# Altium PCB MB1189.PcbDoc (part 2 of 3)
Units mil, origin at the board's own origin, x right, y up, seen from the top; angles counter-clockwise.
Board outline 3826.77 x 2234.25 mil, 6 copper layers (Top Layer, GND_TOP, Internal Signal 1, VCC, Internal Signal 2, Bottom Layer), stack 62.65 mil thick; 150 components, 157 nets, 740 pads, 457 vias.
Unrouted connection lines stored in the file: 6.
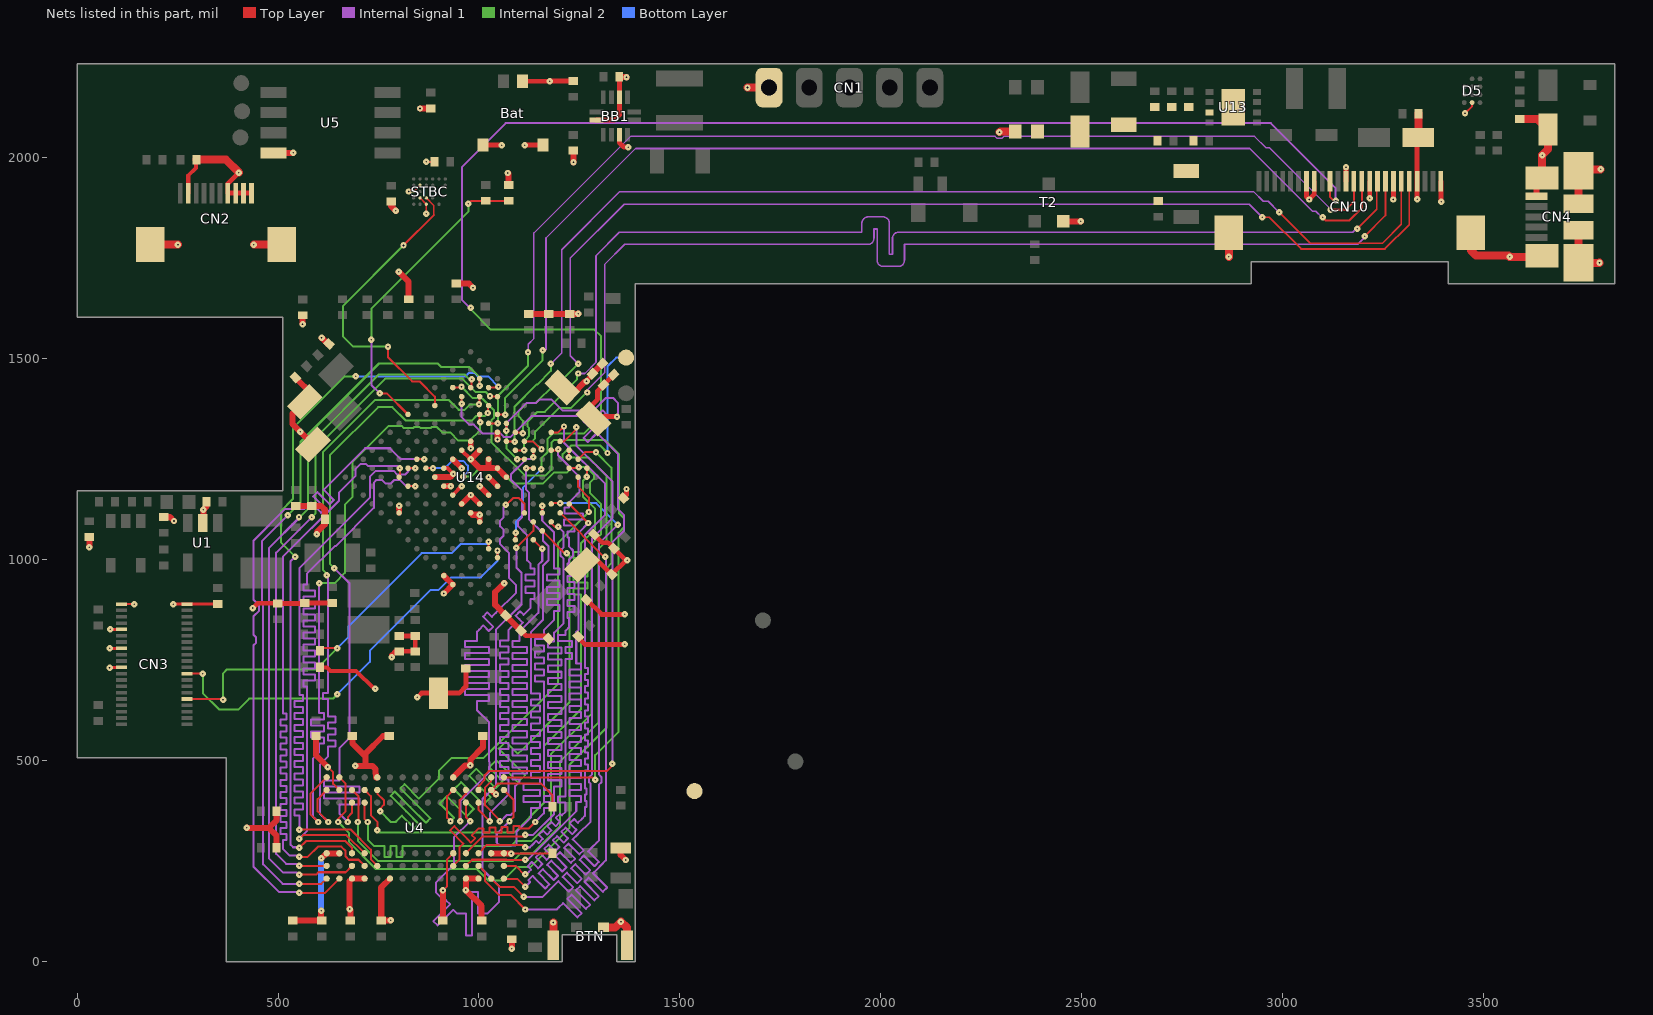
[diagram p6: the nets of this part, all layers, seen from the top]

## Via types
v1: diameter 16, hole 4, Top Layer to Bottom Layer, 457 vias

## Nets (pads, with @x,y where several pads share a name; then routed paths per layer and width w, separated by ;. In a path a pad name is that pad's centre, name@x,y a point inside that pad or via, vN(x,y) a via of type N, cw(c..) or ccw(c..) an arc to the next point about the centre after c; other vN are vias at no path point) (continued)
BATMS: Rdiv1.1 Rdiv2.2 U14.A8 | length 775.8
  Top Layer w5: v1(752.95,1414.37) 770.67,1414.37 U14.A8@823.43,1361.61 ; v1(973.47,1885.92) 980.94,1893.39 Rdiv1.1@1016.74,1893.39 Rdiv2.2@1073.81,1893.39
  Internal Signal 1 w5: v1(732.28,1547.24) 732.28,1435.04 v1(752.95,1414.37)
  Internal Signal 2 w5: v1(732.28,1547.24) 732.28,1625 973.47,1866.19 v1(973.47,1885.92)
BATMS_EN: STBC.C2 U14.B10 | length 774.6
  Top Layer w4: STBC.C2@869.09,1900.59 887.8,1881.89 887.8,1857.71
  Top Layer w5: v1(773.62,1530.51) 773.62,1504.05 833.75,1443.92 852.12,1443.92 890.25,1405.8 U14.B10@890.25,1383.88 ; v1(812.29,1782.2) 887.8,1857.71
  Internal Signal 2 w5: v1(773.62,1530.51) 687.01,1530.51 661.42,1556.1 661.42,1568.82 661.34,1568.9 661.34,1631.26 v1(812.29,1782.2)
BLGND: C55.2 C56.2 C61.2 C63.1 C64.1 C66.1 C79.2 L2.2 R58.1 R59.2 U13.3 U13.9 | length 0.9
  Top Layer w12: C64.1@2765.75,2126.6 C64.1@2766.36,2125.98
BOOT0: TP8.1 U14.E6 | length 898.2
  Top Layer w5: U14.E6@867.97,1227.98 877.72,1227.98 v1(885.72,1227.98)
  Internal Signal 2 w5: v1(960.68,1206.75) 980.37,1206.75 1001.97,1228.35 1046.26,1228.35 1084.65,1189.96 1159.81,1189.96 1186.53,1216.68 1218.65,1216.68 1224.41,1222.44 1224.41,1232.14 1207.98,1248.56 1207.98,1263.1 1229.33,1284.45 1301.31,1284.45 v1(1319.95,1265.81)
  Bottom Layer w5: v1(885.72,1227.98) 914.99,1227.98 933.07,1246.06 960.9,1246.06 972.56,1234.4 972.56,1218.63 v1(960.68,1206.75) ; v1(1319.95,1265.81) 1319.95,1481.36 1341.54,1502.95 TP8.1@1366.14,1502.95
CAM_PWDN: CN3.17 U14.P5 | length 1050.4
  Top Layer w5: CN3.17@273.82,716.54 v1@312.97,716.54 ; U14.P5@1046.14,1005.27 1046.14,1015.01 v1(1046.14,1023.01)
  Internal Signal 2 w5: v1(313.01,716.57) 313.01,668.29 354.33,626.97 400.59,626.97 428.15,654.53 636.81,654.53 v1(647.64,665.35)
  Bottom Layer w5: v1(647.64,665.35) 728.35,746.06 728.35,773.62 879.95,925.23 899.64,925.23 930.75,956.34 1004.57,956.34 1046.14,997.92 v1(1046.14,1023.01)
CAM_RST: CN3.9 R7.1 U14.N5 | length 1031
  Top Layer w5: CN3.9@273.82,653.54 361.22,653.54 v1(363.19,651.57) ; R7.1@604.64,775.26 609.3,779.92 v1(647.64,779.92) ; U14.N5@1023.87,1027.54 1023.87,1037.28 v1(1023.87,1045.28)
  Internal Signal 2 w5: v1(363.19,651.57) 363.19,717.52 373.03,727.36 595.08,727.36 v1(647.64,779.92)
  Bottom Layer w5: v1(647.64,779.92) 675.71,808 675.71,834.93 857.52,1016.73 932.09,1016.73 954.72,1039.37 1017.96,1039.37 v1(1023.87,1045.28)
D0: TP1.1 U4.R8 U14.L12 | length 1729.2
  Top Layer w5: U4.R8@1062.01,427.17 1085.63,403.54 1085.63,359.04 v1(1076,349.41) ; v1(1117.48,1227.98) 1125.48,1227.98 U14.L12@1135.23,1227.98
  Internal Signal 1 w5: v1(1076,349.41) 1044.5,317.91 1044.29,317.91 1044.29,296.26 1051.18,289.37 1091.54,289.37 1093.5,291.34 1093.5,323.1 1129.92,359.52 1129.92,367.02 1129.92,382.02 1151.42,382.02 1151.42,397.02 1129.92,397.02 1110.39,397.02 1110.39,412.02 1129.92,412.02 1151.42,412.02 1151.42,427.02 1129.92,427.02 1110.39,427.02 1110.39,442.02 1129.92,442.02 1151.42,442.02 1151.42,457.02 1129.92,457.02 1129.92,472.02 1151.42,472.02 1151.42,487.02 1129.92,487.02 1129.92,502.02 1151.42,502.02 1151.42,517.02 1129.92,517.02 1129.92,532.02 1151.42,532.02 1151.42,547.02 1129.92,547.02 1129.92,562.02 1151.42,562.02 1151.42,577.02 1129.92,577.02 1129.92,592.02 1151.42,592.02 1151.42,607.02 1129.92,607.02 1129.92,622.02 1151.42,622.02 1151.42,637.02 1129.92,637.02 1129.92,652.02 1151.42,652.02 1151.42,667.02 1129.92,667.02 1129.92,682.02 1129.92,688.98 1129.92,820.87 1159.45,850.39 1159.45,984.87 1173,998.43 1173,1033.96 1159.45,1047.51 1159.45,1065.96 1124.26,1101.15 1124.26,1167.59 1117.48,1174.36 v1(1117.48,1227.98)
D1: U4.N7 U14.K13 | length 1751.6
  Top Layer w5: U4.N7@999.02,395.67 999.02,377.44 v1(1027.04,349.41) ; v1(1134.84,1254.92) 1135.23,1255.31 U14.K13@1135.23,1272.52
  Internal Signal 1 w5: v1(1027.04,349.41) 1027.04,369.56 1073.82,416.34 1073.82,423.84 1073.82,438.84 1073.82,453.84 1052.32,453.84 1052.32,468.84 1073.82,468.84 1073.82,483.84 1052.32,483.84 1052.32,498.84 1073.82,498.84 1073.82,513.84 1052.32,513.84 1052.32,528.84 1073.82,528.84 1073.82,543.84 1052.32,543.84 1052.32,558.84 1073.82,558.84 1073.82,573.84 1052.32,573.84 1052.32,588.84 1073.82,588.84 1073.82,603.84 1052.32,603.84 1052.32,618.84 1073.82,618.84 1073.82,633.84 1052.32,633.84 1052.32,648.84 1073.82,648.84 1073.82,663.84 1052.32,663.84 1052.32,678.84 1073.82,678.84 1073.82,693.84 1052.32,693.84 1052.32,708.84 1073.82,708.84 1073.82,723.84 1052.32,723.84 1052.32,738.84 1073.82,738.84 1073.82,753.84 1052.32,753.84 1052.32,768.84 1073.82,768.84 1073.82,783.84 1052.32,783.84 1052.32,798.84 1073.82,798.84 1073.82,813.84 1073.82,825.79 1079.12,831.09 1089.73,841.7 1098.41,833.02 1109.01,843.63 1100.34,852.3 1091.49,861.15 1102.09,871.76 1110.94,862.91 1121.55,873.52 1128.46,880.43 1128.46,887.93 1128.46,902.93 1137.64,902.93 1137.64,917.93 1128.46,917.93 1116.19,917.93 1116.19,932.93 1128.46,932.93 1137.64,932.93 1137.64,947.93 1128.46,947.93 1116.19,947.93 1116.19,962.93 1128.46,962.93 1137.64,962.93 1137.64,977.93 1128.46,977.93 1128.46,986.22 1128.46,990.12 1119.73,998.85 1119.73,1061.13 1097.46,1083.41 1097.46,1096.25 1107.28,1106.07 1107.28,1171.72 1079.71,1199.29 1079.71,1212.83 1117.48,1250.6 1130.52,1250.6 v1(1134.84,1254.92)
D2: U4.R9 U14.B12 | length 1727.1
  Top Layer w5: U14.B12@934.79,1428.42 954.23,1428.42 v1(956.61,1430.8) ; U4.R9@1062.01,458.66 1283.46,458.66 v1(1289.37,452.76)
  Internal Signal 2 w5: v1(956.61,1430.8) 985.04,1402.38 1006.47,1402.38 1008.26,1400.59 1008.86,1400.59 1037.4,1372.05 1037.4,1353.61 1030.64,1346.86 1030.64,1292.9 1113.44,1210.1 1165.81,1210.1 1181.07,1225.36 1181.07,1292.29 1187.01,1298.23 1312.99,1298.23 1348.43,1262.8 1348.43,1115.65 1360.97,1103.1 1360.97,1081.18 1347.44,1067.65 1347.44,571.85 1289.37,513.78 v1(1289.37,452.76)
D3: U4.N8 U14.C12 | length 1852.9
  Top Layer w5: v1(957.06,1388.4) 957.06,1396.4 U14.C12@957.06,1406.15 ; U4.N8@999.02,427.17 999.02,436.92 1014.39,452.29 1014.39,464.28 1024.14,474.04 1318.52,474.04 1331.76,487.27 v1(1331.76,492.15)
  Internal Signal 1 w5: v1(957.06,1388.4) 957.06,1354.95 974.92,1337.09 985.75,1337.09 986.74,1336.1 987.45,1336.1 1008.73,1314.82 1052.56,1314.82 1061.29,1306.09 1079,1306.09 1130.19,1357.28 1251.37,1357.89 1261.97,1347.28 ; 1260.04,1345.34 1270.64,1334.74 1272.58,1336.67 1307.93,1372.03 1318.54,1361.42 1283.19,1326.07 1260.39,1303.27 1271,1292.66 1293.79,1315.46 1300.2,1309.06 1346.46,1262.8 1346.46,1125.98 1361.22,1111.22 1361.22,1072.83 1331.76,1043.37 v1(1331.76,492.15)
D4: U4.P9 U14.R8 | length 1719
  Top Layer w5: U4.P9@1030.51,458.66 1030.51,448.91 1015.14,433.53 1015.14,388.69 1051.52,352.31 v1(1051.52,349.41) ; U14.R8@1135.23,1049.81 v1(1157.5,1027.54)
  Internal Signal 1 w5: v1(1051.52,349.41) 1054.08,349.41 1069.58,364.91 1079.48,364.91 1090.3,375.74 1090.3,436.76 1100.39,446.85 1100.39,453.37 1083.82,453.37 1083.82,468.37 1100.39,468.37 1119.92,468.37 1119.92,483.37 1100.39,483.37 1083.82,483.37 1083.82,498.37 1100.39,498.37 1119.92,498.37 1119.92,513.37 1100.39,513.37 1083.82,513.37 1083.82,528.37 1100.39,528.37 1119.92,528.37 1119.92,543.37 1100.39,543.37 1083.82,543.37 1083.82,558.37 1100.39,558.37 1119.92,558.37 1119.92,573.37 1100.39,573.37 1083.82,573.37 1083.82,588.37 1100.39,588.37 1119.92,588.37 1119.92,603.37 1100.39,603.37 1083.82,603.37 1083.82,618.37 1100.39,618.37 1119.92,618.37 1119.92,633.37 1100.39,633.37 1083.82,633.37 1083.82,648.37 1100.39,648.37 1119.92,648.37 1119.92,663.37 1100.39,663.37 1083.82,663.37 1083.82,678.37 1100.39,678.37 1119.92,678.37 1119.92,693.37 1100.39,693.37 1083.82,693.37 1083.82,708.37 1100.39,708.37 1119.92,708.37 1119.92,723.37 1100.39,723.37 1083.82,723.37 1083.82,738.37 1100.39,738.37 1119.92,738.37 1119.92,753.37 1100.39,753.37 1083.82,753.37 1083.82,768.37 1100.39,768.37 1119.92,768.37 1119.92,783.37 1100.39,783.37 1083.82,783.37 1083.82,798.37 1100.39,798.37 1100.39,813.37 1100.39,820.87 1147.64,868.11 1147.64,987.2 1157.5,997.07 v1(1157.5,1027.54)
D5: U4.M8 U14.N9 | length 1737.6
  Top Layer w5: v1(953.61,349.41) 951.77,351.25 951.77,401.66 967.52,417.41 U4.M8@967.52,427.17 ; v1(1066.98,1136.87) 1068.31,1136.87 1084.73,1153.28 1099.67,1153.28 1112.96,1140 U14.N9@1112.96,1116.62
  Internal Signal 1 w5: v1(953.61,349.41) 953.61,399.48 1025.39,471.26 1025.39,483.91 1025.83,484.35 1025.83,497.19 1025.39,497.63 1025.39,595.67 995.08,625.98 995.08,633.48 995.08,648.48 1025.08,648.48 1025.08,663.48 995.08,663.48 965.08,663.48 965.08,678.48 995.08,678.48 1025.08,678.48 1025.08,693.48 995.08,693.48 965.08,693.48 965.08,708.48 995.08,708.48 1025.08,708.48 1025.08,723.48 995.08,723.48 965.08,723.48 965.08,738.48 995.08,738.48 1025.08,738.48 1025.08,753.48 995.08,753.48 965.08,753.48 965.08,768.48 995.08,768.48 1025.08,768.48 1025.08,783.48 995.08,783.48 965.08,783.48 965.08,798.48 995.08,798.48 995.08,813.48 995.08,820.87 1000.38,826.17 1010.99,836.78 1024.91,822.85 1035.52,833.46 1021.6,847.38 1010.43,858.55 1021.04,869.16 1032.2,857.99 1042.32,868.11 1092.52,918.31 1092.52,936.97 1075.19,954.31 1075.19,1016.59 1052.92,1038.86 1052.92,1051.7 1061.64,1060.43 1061.64,1074.68 1052.92,1083.41 1052.92,1096.95 1061.64,1105.68 1061.64,1131.53 v1(1066.98,1136.87)
D6: U4.M7 U14.P9 | length 1815.3
  Top Layer w5: U4.M7@967.52,395.67 967.52,359.98 v1(978.09,349.41) ; v1(1092.57,1029.58) 1135.23,1072.23 U14.P9@1135.23,1094.35
  Internal Signal 1 w5: v1(978.09,349.41) 937.74,309.07 937.74,240.89 892.72,195.87 892.72,172.24 909.45,155.51 914.75,150.21 917.57,153.03 928.18,142.42 925.36,139.6 886.54,100.78 897.14,90.17 935.97,129 944.88,120.08 952.38,120.08 967.38,120.08 967.38,65.18 982.38,65.18 982.38,120.08 982.38,173.61 997.38,173.61 997.38,120.08 1012.38,120.08 1020.67,120.08 1021.65,120.08 1050.2,148.62 1050.2,187.99 1008.86,229.33 1008.86,404.76 1035.95,431.86 1036.19,431.86 1042.32,437.99 1042.32,826.13 1106.19,889.99 1106.19,967.15 1093.5,979.83 1093.5,1028.65 v1(1092.57,1029.58)
D7: U4.L8 U14.R9 | length 1636.3
  Top Layer w5: v1(929.13,349.41) 920.65,357.89 920.65,411.79 U4.L8@936.02,427.17 ; U14.R9@1157.5,1072.08 1212.85,1016.73 v1(1218.5,1016.73)
  Internal Signal 2 w5: v1(929.13,349.41) 937.97,358.25 902.62,393.6 920.3,411.28 955.65,375.93 969.36,362.22 987.04,379.89 973.33,393.6 937.97,428.96 955.65,446.64 991.01,411.28 1011.17,391.12 1028.85,408.8 1008.68,428.96 975.35,462.29 993.03,479.97 1026.36,446.64 1041.19,431.81 1058.86,449.49 1044.04,464.31 1024.92,483.43 1042.6,501.11 1061.72,481.99 1097.07,446.64 1114.75,464.31 1079.39,499.67 1049.06,530 1066.74,547.68 1097.07,517.35 1107.28,527.56 1225.39,645.67 1225.39,1009.84 v1(1218.5,1016.73)
D8: U4.L2 U14.P10 | length 1756
  Top Layer w5: U4.L2@936.02,238.19 951.4,253.56 951.4,284.07 961.15,293.83 928.25,326.73 938.86,337.34 971.76,304.44 979.95,296.25 990.55,306.86 982.37,315.04 992.97,325.65 998.28,330.95 1010.78,330.95 1010.78,321.52 1025.78,321.52 1025.78,330.95 1025.78,333.91 1040.78,333.91 1040.78,330.95 1040.78,321.52 1055.78,321.52 1055.78,330.95 1055.78,334.51 1070.78,334.51 1070.78,330.95 1070.78,321.52 1085.78,321.52 1085.78,330.95 1085.78,337.39 1100.78,337.39 1100.78,330.95 1115.78,330.95 1123.28,330.95 v1(1139.76,347.44) ; U14.P10@1157.5,1116.62 1157.5,1126.37 v1(1157.5,1134.37)
  Internal Signal 1 w5: v1@1139.76,342.15 v1(1139.76,347.44) 1161.42,369.09 1161.42,382.3 1177.01,382.3 1177.01,397.3 1161.42,397.3 1161.42,412.3 1177.01,412.3 1177.01,427.3 1161.42,427.3 1161.42,442.3 1161.42,457.3 1161.42,472.3 1161.42,487.3 1161.42,502.3 1161.42,517.3 1161.42,532.3 1161.42,547.3 1161.42,562.3 1161.42,577.3 1161.42,592.3 1161.42,607.3 1161.42,622.3 1161.42,637.3 1161.42,652.3 1161.42,667.3 1161.42,682.3 1161.42,697.3 1139.92,697.3 1139.92,712.3 1161.42,712.3 1161.42,727.3 1139.92,727.3 1139.92,742.3 1161.42,742.3 1161.42,757.3 1139.92,757.3 1139.92,772.3 1161.42,772.3 1161.42,787.3 1139.92,787.3 1139.92,802.3 1161.42,802.3 1161.42,817.3 1161.42,824.8 1187.01,850.39 1187.01,857.89 1187.01,872.89 1200.63,872.89 1200.63,887.89 1187.01,887.89 1169.45,887.89 1169.45,902.89 1187.01,902.89 1200.63,902.89 1200.63,917.89 1187.01,917.89 1169.45,917.89 1169.45,932.89 1187.01,932.89 1200.63,932.89 1200.63,947.89 1187.01,947.89 1169.45,947.89 1169.45,962.89 1187.01,962.89 1200.63,962.89 1200.63,977.89 1187.01,977.89 1187.01,983.27 1187.01,1067.91 1157.5,1097.42 v1(1157.5,1134.37)
D9: U4.M3 U14.R10 | length 1840.9
  Top Layer w5: U4.M3@967.52,269.68 1009.35,311.52 v1@1115.16,311.52 ; U14.R10@1179.77,1094.35 1179.77,1090.9 1188.92,1081.75 v1(1196.91,1081.75)
  Internal Signal 1 w5: v1@1115.16,311.52 v1@1117.13,313.49 ; v1(1115.16,315.45) 1135.02,315.45 1187.01,367.44 1187.01,435.04 1187.01,436.4 1205.55,436.4 1205.55,451.4 1187.01,451.4 1171.42,451.4 1171.42,466.4 1187.01,466.4 1205.55,466.4 1205.55,481.4 1187.01,481.4 1171.42,481.4 1171.42,496.4 1187.01,496.4 1205.55,496.4 1205.55,511.4 1187.01,511.4 1171.42,511.4 1171.42,526.4 1187.01,526.4 1205.55,526.4 1205.55,541.4 1187.01,541.4 1171.42,541.4 1171.42,556.4 1187.01,556.4 1205.55,556.4 1205.55,571.4 1187.01,571.4 1171.42,571.4 1171.42,586.4 1187.01,586.4 1205.55,586.4 1205.55,601.4 1187.01,601.4 1171.42,601.4 1171.42,616.4 1187.01,616.4 1205.55,616.4 1205.55,631.4 1187.01,631.4 1171.42,631.4 1171.42,646.4 1187.01,646.4 1205.55,646.4 1205.55,661.4 1187.01,661.4 1171.42,661.4 1171.42,676.4 1187.01,676.4 1205.55,676.4 1205.55,691.4 1187.01,691.4 1171.42,691.4 1171.42,706.4 1187.01,706.4 1205.55,706.4 1205.55,721.4 1187.01,721.4 1171.42,721.4 1171.42,736.4 1187.01,736.4 1205.55,736.4 1205.55,751.4 1187.01,751.4 1171.42,751.4 1171.42,766.4 1187.01,766.4 1205.55,766.4 1205.55,781.4 1187.01,781.4 1171.42,781.4 1171.42,796.4 1187.01,796.4 1187.01,811.4 1187.01,818.9 1210.63,842.52 1210.63,1002.69 1203,1010.31 1203,1023.15 1210.63,1030.78 1210.63,1068.02 v1(1196.91,1081.75)
D10: U4.M2 U14.R12 | length 1770.4
  Top Layer w5: U4.M2@967.52,238.19 982.89,253.56 1068.38,253.56 1068.46,253.48 1114.88,253.48 v1(1115.16,253.2) ; U14.R12@1224.31,1138.89 v1(1271.65,1091.55)
  Internal Signal 1 w5: v1@1118.11,250.25 1242.13,374.26 1242.13,381.76 1242.13,396.76 1253.78,396.76 1253.78,411.76 1242.13,411.76 1225.55,411.76 1225.55,426.76 1242.13,426.76 1253.78,426.76 1253.78,441.76 1242.13,441.76 1225.55,441.76 1225.55,456.76 1242.13,456.76 1253.78,456.76 1253.78,471.76 1242.13,471.76 1225.55,471.76 1225.55,486.76 1242.13,486.76 1253.78,486.76 1253.78,501.76 1242.13,501.76 1225.55,501.76 1225.55,516.76 1242.13,516.76 1253.78,516.76 1253.78,531.76 1242.13,531.76 1225.55,531.76 1225.55,546.76 1242.13,546.76 1253.78,546.76 1253.78,561.76 1242.13,561.76 1225.55,561.76 1225.55,576.76 1242.13,576.76 1253.78,576.76 1253.78,591.76 1242.13,591.76 1225.55,591.76 1225.55,606.76 1242.13,606.76 1253.78,606.76 1253.78,621.76 1242.13,621.76 1225.55,621.76 1225.55,636.76 1242.13,636.76 1253.78,636.76 1253.78,651.76 1242.13,651.76 1225.55,651.76 1225.55,666.76 1242.13,666.76 1253.78,666.76 1253.78,681.76 1242.13,681.76 1225.55,681.76 1225.55,696.76 1242.13,696.76 1253.78,696.76 1253.78,711.76 1242.13,711.76 1225.55,711.76 1225.55,726.76 1242.13,726.76 1253.78,726.76 1253.78,741.76 1242.13,741.76 1242.13,753.94 1242.13,820.5 1247.87,826.25 1247.87,1067.77 v1(1271.65,1091.55)
D11: U4.P1 U14.P11 | length 1643.1
  Top Layer w5: U4.P1@1030.51,206.69 1051.18,186.02 1086.98,186.02 1111.27,161.73 v1(1111.27,161.43) ; U14.P11@1179.77,1138.89 1181.62,1140.75 v1(1201.77,1140.75)
  Internal Signal 1 w5: v1(1111.27,161.43) 1158.47,161.43 1182.58,185.53 1186.86,189.81 1197.47,200.42 1223.86,174.02 1234.47,184.63 1208.07,211.03 1218.68,221.63 1245.07,195.24 1255.68,205.84 1229.29,232.24 1239.89,242.84 1266.29,216.45 1276.89,227.06 1250.5,253.45 1261.11,264.06 1287.5,237.66 1298.11,248.27 1271.71,274.66 1282.32,285.27 1292.93,295.88 1298.23,301.18 1298.23,439.69 1304.87,446.34 1304.87,459.18 1298.23,465.82 1298.23,1040.35 v1(1345.47,1087.6)
  Bottom Layer w5: v1(1201.77,1140.75) 1292.32,1140.75 v1(1345.47,1087.6)
D12: U4.N2 U14.R11 | length 1739.5
  Top Layer w5: U4.N2@999.02,238.19 1015.14,222.07 1015.14,200.32 1049.44,166.02 1078.81,166.02 v1(1115.16,129.67) ; U14.R11@1202.04,1116.62 1310.79,1007.87 v1(1313.98,1007.87)
  Internal Signal 1 w5: v1(1115.16,129.67) 1193.65,129.67 1198.95,134.98 1209.56,145.58 1244.92,110.23 1255.52,120.84 1220.17,156.19 1230.77,166.8 1266.13,131.44 1276.74,142.05 1241.38,177.4 1251.99,188.01 1287.34,152.66 1297.95,163.26 1262.59,198.62 1273.2,209.22 1308.56,173.87 1319.16,184.48 1283.81,219.83 1294.41,230.44 1303.64,239.67 1315.94,251.97 1315.94,1006.89 1314.96,1007.87 v1(1313.98,1007.87)
D13: U4.R1 U14.L15 | length 1788.3
  Top Layer w5: v1(1115.16,186.02) 1095.38,205.8 U4.R1@1062.9,205.8 ; U14.L15@1202.04,1294.79 1212.11,1294.79 1242.61,1325.29 v1(1242.61,1329.53) ; U4.R1@1062.9,205.8 1062.01,205.8 U4.R1@1062.01,206.69 U4.R1@1062.9,205.8
  Internal Signal 1 w5: v1(1115.16,186.02) 1122.05,192.91 1127.35,198.22 1122.75,202.82 1133.35,213.43 1137.96,208.82 1164.84,181.94 1175.45,192.54 1148.56,219.43 1159.17,230.04 1186.06,203.15 1196.66,213.76 1169.78,240.64 1180.38,251.25 1207.27,224.36 1217.88,234.97 1190.99,261.86 1201.6,272.46 1228.48,245.58 1239.09,256.18 1212.2,283.07 1222.81,293.68 1249.7,266.79 1260.3,277.4 1233.42,304.28 1244.02,314.89 1246.06,316.93 1277.72,348.58 1277.72,442.49 1273.87,446.34 1273.87,459.18 1281.5,466.8 1281.5,1053.15 1332.68,1104.33 1332.68,1193.9 1242.61,1283.96 v1(1242.61,1329.53)
D14: U4.N3 U14.L14 | length 1749.6
  Top Layer w5: U4.N3@999.02,269.68 1019.69,290.35 1109.13,290.35 v1(1115.16,284.33) ; U14.L14@1179.77,1272.52 1194.76,1272.52 v1(1196.91,1274.67)
  Internal Signal 1 w5: v1(1115.16,284.33) 1126.39,284.33 1126.74,284.68 1132.04,289.98 1142.65,300.59 1148.48,294.76 1159.09,305.36 1153.26,311.19 1149.08,315.37 1159.68,325.98 1163.86,321.8 1169.69,315.97 1180.3,326.58 1174.47,332.41 1170.29,336.59 1180.9,347.19 1185.08,343.01 1190.91,337.18 1201.51,347.79 1195.68,353.62 1191.5,357.8 1202.11,368.41 1206.29,364.23 1215.55,373.49 1215.55,380.99 1215.55,395.99 1197.01,395.99 1197.01,410.99 1215.55,410.99 1215.55,423.23 1215.55,730.32 1215.55,737.82 1215.55,752.82 1232.13,752.82 1232.13,767.82 1215.55,767.82 1215.55,782.82 1232.13,782.82 1232.13,797.82 1215.55,797.82 1197.01,797.82 1197.01,812.82 1215.55,812.82 1215.55,823.82 1224.41,832.68 1224.41,840.18 1224.41,855.18 1220.63,855.18 1220.63,870.18 1224.41,870.18 1237.88,870.18 1237.88,885.18 1224.41,885.18 1220.63,885.18 1220.63,900.18 1224.41,900.18 1237.88,900.18 1237.88,915.18 1224.41,915.18 1220.63,915.18 1220.63,930.18 1224.41,930.18 1237.88,930.18 1237.88,945.18 1224.41,945.18 1220.63,945.18 1220.63,960.18 1224.41,960.18 1237.88,960.18 1237.88,975.18 1224.41,975.18 1220.63,975.18 1220.63,990.18 1224.41,990.18 1224.41,1000.72 1234,1010.31 1234,1023.15 1224.41,1032.75 1224.41,1040.25 1224.41,1055.25 1220.63,1055.25 1220.63,1070.25 1224.41,1070.25 1238.19,1070.25 1238.19,1085.25 1224.41,1085.25 1212.01,1085.25 1212.01,1100.25 1224.41,1100.25 1258.58,1100.25 1258.58,1115.25 1224.41,1115.25 1213.17,1115.25 1213.17,1130.25 1224.41,1130.25 1224.41,1138.89 1224.41,1142.72 1250,1168.31 1250,1206.47 1196.91,1259.56 v1(1196.91,1274.67)
D15: U4.R2 U14.K15 | length 1755.5
  Top Layer w5: U4.R2@1062.01,238.19 1091.17,238.19 v1@1115.16,214.2 ; v1@1115.03,216.29 v1@1115.16,216.17 ; U14.K15@1179.77,1317.06 1196.98,1317.06 v1(1211.61,1331.69)
  Internal Signal 1 w5: v1@1115.16,214.2 1124.38,223.43 1129.69,228.73 1121.15,237.27 1131.75,247.88 1140.29,239.34 1147.31,232.32 1157.92,242.92 1150.9,249.94 1141.42,259.42 1152.03,270.03 1161.51,260.55 1168.53,253.53 1179.13,264.14 1172.11,271.15 1162.64,280.63 1173.24,291.24 1182.72,281.76 1189.74,274.74 1200.34,285.35 1193.33,292.37 1183.85,301.85 1194.46,312.45 1203.93,302.97 1210.95,295.96 1221.56,306.56 1214.54,313.58 1205.06,323.06 1215.67,333.67 1225.15,324.19 1232.16,317.17 1242.77,327.78 1235.75,334.79 1226.28,344.27 1236.88,354.88 1246.36,345.4 1256.97,356.01 1263.78,362.82 1263.78,370.32 1263.78,385.32 1267.72,385.32 1267.72,400.32 1263.78,400.32 1263.78,415.32 1267.72,415.32 1267.72,430.32 1263.78,430.32 1263.78,445.32 1263.78,460.32 1263.78,475.32 1271.5,475.32 1271.5,490.32 1263.78,490.32 1263.78,505.32 1271.5,505.32 1271.5,520.32 1263.78,520.32 1263.78,535.32 1271.5,535.32 1271.5,550.32 1263.78,550.32 1263.78,565.32 1271.5,565.32 1271.5,580.32 1263.78,580.32 1263.78,595.32 1271.5,595.32 1271.5,610.32 1263.78,610.32 1263.78,625.32 1271.5,625.32 1271.5,640.32 1263.78,640.32 1263.78,655.32 1271.5,655.32 1271.5,670.32 1263.78,670.32 1263.78,685.32 1271.5,685.32 1271.5,700.32 1263.78,700.32 1263.78,715.32 1271.5,715.32 1271.5,730.32 1263.78,730.32 1263.78,745.32 1263.78,752.95 1263.78,1061.76 1313.98,1111.96 1313.98,1188.9 1211.61,1291.26 v1(1211.61,1331.69)
  other v1: 1115.16,217.15
D16: U4.E8 U14.P14 | length 1638.2
  Top Layer w5: U4.E8@747.05,427.17 747.05,418.31 763.17,402.18 763.17,390.05 753.97,380.85 v1(753.97,374.03) ; U14.P14@1246.58,1205.71 1246.58,1181.52 1273.62,1154.48 v1(1273.62,1118.96)
  Internal Signal 2 w5: v1(753.97,374.03) 780.57,347.44 792.32,347.44 797.63,352.74 808.23,363.35 839.64,331.94 850.25,342.55 818.84,373.96 780.02,412.78 790.62,423.39 829.45,384.56 868.27,345.74 878.88,356.35 840.05,395.17 804.26,430.96 814.87,441.57 850.66,405.78 856.3,411.42 900,455.12 900,474.81 931.46,506.27 1011.19,506.27 1039.06,534.14 1062.6,557.68 1196.85,691.93 1196.85,1042.19 v1(1273.62,1118.96)
D17: U4.D7 U14.N14 | length 1694.9
  Top Layer w5: U4.D7@715.55,395.67 715.55,354.67 v1(722.78,347.44) ; U14.N14@1224.31,1227.98 1245.65,1227.98 v1(1248.03,1230.36)
  Internal Signal 2 w5: v1(722.78,347.44) 723.35,346.87 723.35,303.23 738.93,287.65 742.13,287.65 749.63,287.65 764.63,287.65 764.63,260 779.63,260 779.63,287.65 794.63,287.65 794.63,260 809.63,260 809.63,287.65 824.63,287.65 831.69,287.65 1078.99,287.65 1091.17,299.83 1130.54,299.83 1179.13,348.43 1179.13,515.75 1279.53,616.14 1279.53,1038.39 1303.48,1062.34 1303.48,1139.43 1275.86,1167.06 1275.86,1191.44 1286.06,1201.64 1286.06,1212.24 1267.94,1230.36 v1(1248.03,1230.36)
D18: U4.D8 U14.P15 | length 1704.9
  Top Layer w5: U4.D8@715.55,427.17 730.93,411.79 730.93,363.77 747.08,347.61 v1(747.08,326.79) ; v1(1267.78,1206.75) 1268.08,1206.75 1268.85,1207.52 U14.P15@1268.85,1227.98
  Internal Signal 2 w5: v1(747.08,326.79) 751.93,321.94 1088.67,321.94 1161.56,394.83 1161.56,535.58 1253.94,627.95 1253.94,913.39 1253.94,913.84 1235.39,913.84 1235.39,928.84 1253.94,928.84 1269.53,928.84 1269.53,943.84 1253.94,943.84 1235.39,943.84 1235.39,958.84 1253.94,958.84 1269.53,958.84 1269.53,973.84 1253.94,973.84 1235.39,973.84 1235.39,988.84 1253.94,988.84 1269.53,988.84 1269.53,1003.84 1253.94,1003.84 1235.39,1003.84 1235.39,1018.84 1253.94,1018.84 1253.94,1033.84 1253.94,1041.34 1289.12,1076.52 1289.12,1126.97 1258.86,1157.23 1258.86,1196.36 1267.78,1205.28 v1(1267.78,1206.75)
D19: U4.B9 U14.N15 | length 1875.7
  Top Layer w5: v1(649.35,347.44) 649.35,355.06 668.31,374.02 668.31,442.91 U4.B9@652.56,458.66 ; U14.N15@1246.58,1250.25 1264.05,1267.72 v1(1291.34,1267.72)
  Internal Signal 2 w5: v1(649.35,347.44) 676.18,320.61 676.18,297.99 743.86,230.32 995.08,230.32 1023.74,201.65 1058.93,201.65 1092.52,235.24 1127.95,235.24 1225.89,333.17 1225.89,490.65 1317.91,582.68 1317.91,979.33 1329.72,991.14 1329.72,1229.33 v1(1291.34,1267.72)
D20: U4.C8 U14.M15 | length 1744
  Top Layer w5: U4.C8@684.06,427.17 700.18,411.04 700.18,349.32 v1(698.3,347.44) ; v1(1223.48,1254.98) 1224.31,1255.81 U14.M15@1224.31,1272.52
  Internal Signal 2 w5: v1(698.3,347.44) 698.66,347.08 698.66,301.18 749.84,250 1083.65,250 1102.35,268.7 1113.19,268.7 1132.87,268.7 1201.77,337.6 1201.77,499.02 1297.24,594.49 1297.24,1026.67 1316.93,1046.35 1316.93,1209.65 1271.59,1254.98 v1(1223.48,1254.98)
D21: U4.A9 U14.E12 | length 1683.5
  Top Layer w5: v1(600.39,347.44) 580.71,367.13 580.71,418.31 U4.A9@621.06,458.66 ; U14.E12@1001.6,1361.61 1001.6,1343.87 v1(1002.95,1342.52)
  Internal Signal 1 w5: v1(600.39,347.44) 586.61,361.22 586.61,504.92 602.36,520.67 602.36,528.17 602.36,543.17 614.87,543.17 614.87,558.17 602.36,558.17 581.85,558.17 581.85,573.17 602.36,573.17 614.87,573.17 614.87,588.17 602.36,588.17 581.85,588.17 581.85,603.17 602.36,603.17 614.87,603.17 614.87,618.17 602.36,618.17 602.36,629.92 v1(602.36,941.93)
  Internal Signal 2 w5: v1(602.36,941.93) 640.75,941.93 666.34,967.52 666.34,1137.35 685.04,1156.05 685.04,1243.11 775.41,1333.48 807.64,1333.48 813.36,1327.76 836.32,1327.76 839.09,1330.52 851.93,1330.52 854.7,1327.76 879.63,1327.76 882.4,1330.52 895.24,1330.52 908.84,1316.93 928.15,1316.93 948.82,1296.26 976.38,1296.26 1002.95,1322.83 v1(1002.95,1342.52)
D22: U4.C7 U14.E13 | length 1840.7
  Top Layer w5: v1(673.82,347.44) 673.82,359.85 684.06,370.08 U4.C7@684.06,395.67 ; v1(1021.7,1365.22) 1022.64,1366.16 1022.64,1382.64 U14.E13@1023.87,1383.88
  Internal Signal 1 w5: v1(639.8,979.3) 678.15,940.95 678.15,557.09 652.56,531.5 652.56,524.61 652.56,460.63 652.56,451.21 614.33,451.21 614.33,436.21 652.56,436.21 702.56,436.21 702.56,421.21 652.56,421.21 614.33,421.21 614.33,406.21 652.56,406.21 702.56,406.21 702.56,391.21 652.56,391.21 652.56,376.21 652.56,368.71 v1(673.82,347.44)
  Internal Signal 2 w5: v1(639.8,979.3) 628.94,990.16 628.94,1259.84 749.02,1379.92 784.45,1379.92 817.28,1347.09 982.91,1347.09 993.84,1358.02 1014.5,1358.02 v1(1021.7,1365.22)
D23: U4.A8 U14.D13 | length 1652.1
  Top Layer w5: U4.A8@621.06,427.17 598.43,404.53 598.43,373.89 v1(624.87,347.44) ; v1(1000.05,1386.88) 1000.98,1387.81 1000.98,1405.53 U14.D13@1001.6,1406.15
  Internal Signal 1 w5: v1(621.09,961.66) 624.87,957.88 624.87,678.15 624.87,668.41 612.36,668.41 612.36,653.41 624.87,653.41 624.87,638.41 624.87,630.91 624.87,625.3 624.87,610.3 642.56,610.3 642.56,595.3 624.87,595.3 624.87,580.3 642.56,580.3 642.56,565.3 624.87,565.3 624.87,550.3 642.56,550.3 642.56,535.3 624.87,535.3 624.87,520.3 624.87,512.8 624.87,510.7 604.33,490.16 604.33,367.98 v1(624.87,347.44)
  Internal Signal 2 w5: v1(621.09,961.66) 621.09,965.39 612.2,974.28 612.2,1268.7 740.96,1397.46 925.39,1397.46 949.63,1373.22 949.98,1373.57 950.64,1372.9 964.44,1372.9 978.41,1386.88 v1(1000.05,1386.88)
D24: U4.A2 U14.E14 | length 1732.1
  Top Layer w5: v1(553.15,238.33) 586.47,238.33 586.61,238.19 U4.A2@621.06,238.19 ; v1@1028.54,1407.48 v1(1027.56,1407.48) 1028.89,1406.15 U14.E14@1046.14,1406.15
  Internal Signal 1 w5: v1(553.15,238.33) 548.32,243.15 520.38,243.15 495.08,268.46 495.08,1017.72 v1(583.66,1106.3)
  Internal Signal 2 w5: v1(583.66,1106.3) 593.5,1116.14 593.5,1277.56 766.55,1450.61 958.72,1450.61 991.89,1417.45 1017.59,1417.45 v1(1027.56,1407.48)
D25: U4.C3 U14.D14 | length 1860.2
  Top Layer w5: v1(553.15,283.04) 570.3,300.2 667.32,300.2 684.06,283.46 U4.C3@684.06,269.68 ; U14.D14@1023.87,1428.42 1046.14,1428.42 v1(1048.52,1430.8)
  Internal Signal 1 w5: v1(542.32,1007.87) 531.5,997.05 531.5,290.72 537.57,284.65 551.54,284.65 v1(553.15,283.04)
  Internal Signal 2 w5: v1(542.32,1007.87) 506.89,1043.31 506.89,1121.06 537.17,1151.34 537.17,1327.52 666.31,1456.67 v1(692.94,1456.67)
  Bottom Layer w5: v1(692.94,1456.67) 966.92,1456.67 975.29,1465.04 988.13,1465.04 996.51,1456.67 1022.66,1456.67 v1(1048.52,1430.8)
D26: U4.A1 U14.C14 | length 1856
  Top Layer w5: v1(553.15,193.62) 607.99,193.62 U4.A1@621.06,206.69 ; v1(1001.6,1432.95) 1001.6,1440.95 U14.C14@1001.6,1450.69
  Internal Signal 1 w5: v1(524.61,1111.06) 460.63,1047.09 460.63,892.59 462.76,890.47 462.76,242.1 511.24,193.62 v1(553.15,193.62)
  Internal Signal 2 w5: v1(524.61,1111.06) 555.94,1142.4 555.94,1293.12 751.29,1488.46 897.37,1488.46 906.1,1479.73 975.98,1479.73 1002.95,1452.76 1002.95,1434.3 v1(1001.6,1432.95)
D27: U4.C2 U14.C13 | length 1809.3
  Top Layer w5: v1(553.15,215.97) 553.87,216.69 594.65,216.69 600.39,222.44 668.31,222.44 U4.C2@684.06,238.19 ; U14.C13@979.33,1428.42 981.71,1430.8 v1(981.71,1449.54)
  Internal Signal 1 w5: v1(552.19,1106.35) 552.19,1104.03 477.36,1029.2 477.36,256.83 511.79,222.41 546.72,222.41 v1(553.15,215.97)
  Internal Signal 2 w5: v1(552.19,1106.35) 554.51,1106.35 574.72,1126.57 574.72,1285.34 750,1460.61 964.71,1460.61 975.77,1449.54 v1(981.71,1449.54)
D28: U4.B1 U14.D6 | length 1790.1
  Top Layer w5: v1(553.15,171.26) 617.13,171.26 U4.B1@652.56,206.69 ; U14.D6@845.7,1250.25 855.45,1250.25 v1(863.45,1250.25)
  Internal Signal 1 w5: v1(553.15,171.26) 551.54,172.87 502.64,172.87 438.98,236.53 438.98,787.15 445.64,793.82 445.64,806.66 438.98,813.32 438.98,859.7 452.76,873.48 452.76,886.32 438.98,900.1 438.98,1047.35 518.19,1126.56 565.76,1126.56 571.07,1131.87 581.67,1142.47 607.22,1116.93 617.82,1127.54 592.28,1153.08 587.43,1157.93 598.03,1168.54 602.89,1163.69 628.43,1138.14 639.04,1148.75 613.49,1174.29 619.7,1180.5 716.76,1277.56 778.03,1277.56 805.34,1250.25 v1(863.45,1250.25)
D29: U4.D2 U14.D4 | length 1739.4
  Top Layer w5: v1(553.15,260.69) 573.84,260.69 599.41,286.26 657.73,286.26 667.93,276.05 667.93,261.81 676.18,253.56 700.18,253.56 U4.D2@715.55,238.19 ; U14.D4@801.16,1205.71 803.19,1207.74 v1(803.19,1227.42)
  Internal Signal 1 w5: v1(553.15,260.69) 549.93,263.9 528.98,263.9 512.8,280.08 512.8,287.58 512.8,302.58 521.5,302.58 521.5,317.58 512.8,317.58 506.06,317.58 506.06,332.58 512.8,332.58 521.5,332.58 521.5,347.58 512.8,347.58 506.06,347.58 506.06,362.58 512.8,362.58 521.5,362.58 521.5,377.58 512.8,377.58 506.06,377.58 506.06,392.58 512.8,392.58 521.5,392.58 521.5,407.58 512.8,407.58 506.06,407.58 506.06,422.58 512.8,422.58 521.5,422.58 521.5,437.58 512.8,437.58 506.06,437.58 506.06,452.58 512.8,452.58 521.5,452.58 521.5,467.58 512.8,467.58 506.06,467.58 506.06,482.58 512.8,482.58 521.5,482.58 521.5,497.58 512.8,497.58 506.06,497.58 506.06,512.58 512.8,512.58 521.5,512.58 521.5,527.58 512.8,527.58 506.06,527.58 506.06,542.58 512.8,542.58 521.5,542.58 521.5,557.58 512.8,557.58 506.06,557.58 506.06,572.58 512.8,572.58 521.5,572.58 521.5,587.58 512.8,587.58 506.06,587.58 506.06,602.58 512.8,602.58 521.5,602.58 521.5,617.58 512.8,617.58 512.8,628.94 512.8,1008.37 652.03,1147.61 652.03,1167.59 692.4,1207.95 692.4,1225.7 705.66,1238.95 718.5,1238.95 724.18,1233.27 797.34,1233.27 v1(803.19,1227.42)
D30: U4.D3 U14.E4 | length 1771.5
  Top Layer w5: v1(553.15,305.4) 562.71,314.96 670.28,314.96 U4.D3@715.55,269.68 ; U14.E4@823.43,1183.44 833.18,1183.44 v1(841.18,1183.44)
  Internal Signal 1 w5: v1(553.15,305.4) 553.15,305.84 571.85,324.54 571.85,677.17 571.85,684.11 563.15,684.11 563.15,699.11 571.85,699.11 592.36,699.11 592.36,714.11 571.85,714.11 563.15,714.11 563.15,729.11 571.85,729.11 592.36,729.11 592.36,744.11 571.85,744.11 563.15,744.11 563.15,759.11 571.85,759.11 592.36,759.11 592.36,774.11 571.85,774.11 563.15,774.11 563.15,789.11 571.85,789.11 592.36,789.11 592.36,804.11 571.85,804.11 563.15,804.11 563.15,819.11 571.85,819.11 592.36,819.11 592.36,834.11 571.85,834.11 563.15,834.11 563.15,849.11 571.85,849.11 592.36,849.11 592.36,864.11 571.85,864.11 563.15,864.11 563.15,879.11 571.85,879.11 592.36,879.11 592.36,894.11 571.85,894.11 563.15,894.11 563.15,909.11 571.85,909.11 592.36,909.11 592.36,924.11 571.85,924.11 563.15,924.11 563.15,939.11 571.85,939.11 571.85,954.11 571.85,961.61 571.85,964.83 641.22,1034.2 643.2,1034.2 738.35,1129.35 738.35,1192.09 745.08,1198.82 758.63,1198.82 767.24,1190.21 781.14,1190.21 789.86,1198.94 803.06,1198.94 817.94,1184.06 840.56,1184.06 v1(841.18,1183.44)
D31: U4.E2 U14.D5 | length 1754.1
  Top Layer w5: v1(553.15,327.76) 554.29,328.9 680.94,328.9 730.93,278.92 730.93,254.31 U4.E2@747.05,238.19 U4.E2@749.02,238.19 ; U14.D5@823.43,1227.98 833.18,1227.98 v1(841.18,1227.98)
  Internal Signal 1 w5: v1(553.15,327.76) 553.15,358.27 553.15,363.76 541.49,363.76 541.49,378.76 553.15,378.76 561.85,378.76 561.85,393.76 553.15,393.76 541.49,393.76 541.49,408.76 553.15,408.76 561.85,408.76 561.85,423.76 553.15,423.76 541.49,423.76 541.49,438.76 553.15,438.76 561.85,438.76 561.85,453.76 553.15,453.76 541.49,453.76 541.49,468.76 553.15,468.76 561.85,468.76 561.85,483.76 553.15,483.76 541.49,483.76 541.49,498.76 553.15,498.76 561.85,498.76 561.85,513.76 553.15,513.76 541.49,513.76 541.49,528.76 553.15,528.76 561.85,528.76 561.85,543.76 553.15,543.76 541.49,543.76 541.49,558.76 553.15,558.76 561.85,558.76 561.85,573.76 553.15,573.76 541.49,573.76 541.49,588.76 553.15,588.76 561.85,588.76 561.85,603.76 553.15,603.76 541.49,603.76 541.49,618.76 553.15,618.76 561.85,618.76 561.85,633.76 553.15,633.76 541.49,633.76 541.49,648.76 553.15,648.76 561.85,648.76 561.85,663.76 553.15,663.76 553.15,671.26 553.15,979.33 665.85,1092.03 728.35,1154.53 728.35,1206.69 742.86,1221.21 787.48,1221.21 796.77,1211.92 815.97,1211.92 832.03,1227.98 v1(841.18,1227.98)
DSI_CK_N: CN10.20 U14.H13 | length 2869.8
  Top Layer w4.3: v1(2948.96,1852.45) 2967.08,1852.45 3045.91,1773.62 3254.48,1773.62 3314.96,1834.11 CN10.20@3314.96,1941.93
  Top Layer w5: U14.H13@1090.69,1317.06 1107.13,1317.06 v1(1109.51,1314.68)
  Internal Signal 1 w4: v1(1247.13,1488.19) 1227.36,1507.96 1227.36,1750.98 1361.22,1884.84 2916.57,1884.84 v1(2948.96,1852.45)
  Internal Signal 2 w5: v1(1109.51,1314.68) 1109.51,1345.93 1098.67,1356.77 1098.67,1369.61 1119.71,1390.65 1141.65,1390.65 1187.02,1436.02 1194.96,1436.02 v1(1247.13,1488.19)
DSI_CK_P: CN10.19 U14.H12 | length 2878
  Top Layer w4.3: v1(2991.14,1865.16) 3068.38,1787.92 3248.55,1787.92 3295.27,1834.64 CN10.19@3295.27,1941.93
  Top Layer w5: U14.H12@1068.41,1294.79 1087.21,1294.79 v1(1088.64,1293.37)
  Internal Signal 1 w4: v1(1179.13,1488.19) 1205.71,1514.76 1205.71,1771.76 1350.29,1916.34 2927.5,1916.34 2951.64,1892.2 2964.09,1892.2 v1(2991.14,1865.16)
  Internal Signal 2 w5: v1(1088.64,1293.37) 1088.64,1381.48 1142.95,1435.79 1144.72,1435.79 1179.13,1470.21 v1(1179.13,1488.19)
DSI_D0_N: CN10.17 U14.J13 | length 2866.9
  Top Layer w4.3: v1(3204.41,1805.43) 3255.9,1856.93 CN10.17@3255.9,1941.93
  Top Layer w5: U14.J13@1112.96,1294.79 1133.36,1294.79 1153.48,1274.67 v1(1155.57,1274.67)
  Internal Signal 1 w4: v1(1269.69,1416.34) 1269.69,1418.42 1271.72,1420.45 1269.69,1422.48 1312.55,1465.35 1312.55,1734.69 1362.82,1784.96 1967.99,1784.96 ccw(c1967.99,1799.96) 1982.99,1799.96 1982.99,1823.21 1990.99,1823.21 1990.99,1745.06 ccw(c2005.99,1745.06) 2005.99,1730.06 2043.99,1730.06 ccw(c2043.99,1745.06) 2058.99,1745.06 2058.99,1784.96 3186.76,1784.96 3204.41,1802.61 v1(3204.41,1805.43)
  Internal Signal 2 w5: v1(1155.57,1274.67) 1155.57,1274.88 1135.01,1295.44 1135.01,1297.05 1140.01,1302.05 1140.01,1318.88 1198.68,1377.56 1228.57,1377.56 v1@1269.69,1418.68 ; v1(1269.69,1416.34) v1@1269.69,1418.68 ; v1@1271.35,1420.34 v1@1269.69,1418.68
DSI_D0_P: CN10.16 U14.J12 | length 2834.9
  Top Layer w4.3: v1(3186.02,1823.82) 3234.07,1871.86 3234.07,1939.78 CN10.16@3236.22,1941.93
  Top Layer w5: U14.J12@1090.69,1272.52 1112.09,1272.52 v1(1112.2,1272.64)
  Internal Signal 1 w4: v1(1247.05,1463.58) 1263.68,1463.58 1291.34,1491.25 1291.34,1756.89 1349.41,1814.96 1952.99,1814.96 1952.99,1838.21 cw(c1967.99,1838.21) 1967.99,1853.21 2005.99,1853.21 cw(c2005.99,1838.21) 2020.99,1838.21 2020.99,1760.06 2028.99,1760.06 2028.99,1799.96 cw(c2043.99,1799.96) 2043.99,1814.96 3174.34,1814.96 3183.2,1823.82 v1(3186.02,1823.82)
  Internal Signal 2 w5: v1(1112.2,1272.64) 1112.2,1295.46 1113.36,1296.61 1113.36,1299.18 1115.93,1299.18 1125.01,1308.26 1125.01,1321.1 1123.01,1323.1 1125.01,1325.1 1125.01,1327.6 1121.37,1331.24 1121.37,1344.08 1145.66,1368.38 1163.92,1368.38 1243.74,1448.19 1243.74,1460.27 v1(1247.05,1463.58)
DSI_D1_N: CN10.14 U14.F13 | length 2781.2
  Top Layer w5: U14.F13@1046.14,1361.61 1064.57,1361.61 v1(1064.96,1361.22) ; v1(3100,1851.97) 3107.74,1844.24 3166.08,1844.24 3196.85,1875.01 CN10.14@3196.85,1941.93
  Internal Signal 1 w4: v1(1158.46,1521.65) 1165.73,1521.65 1166.81,1522.73 1166.81,1571.99 1166.81,1800.67 1389.76,2023.62 2917.76,2023.62 3074.23,1867.15 3082.7,1867.15 3097.88,1851.97 v1(3100,1851.97)
  Internal Signal 2 w5: v1(1064.96,1361.22) 1064.96,1403.05 1158.46,1496.55 v1(1158.46,1521.65)
DSI_D1_P: CN10.13 U14.F12 | length 2813.8
  Top Layer w5: U14.F12@1023.87,1339.34 1046.01,1339.34 v1(1046.31,1339.63) ; v1(3119.09,1871.06) 3157.48,1871.06 3177.16,1890.75 CN10.13@3177.16,1941.93
  Internal Signal 1 w4: v1(1122.1,1516.81) 1122.46,1516.81 1122.46,1536.57 1136.81,1550.91 1136.81,1813.1 1377.34,2053.62 2284.42,2053.62 2289.06,2048.98 2301.49,2048.98 2306.13,2053.62 2930.19,2053.62 2958.73,2025.08 2967.2,2025.08 3119.09,1873.18 v1(3119.09,1871.06)
  Internal Signal 2 w5: v1(1046.31,1339.63) 1047.4,1340.72 1047.4,1407.76 1122.1,1482.46 v1(1122.1,1516.81)
DSI_TE: CN10.10 U14.P7 | length 3731.3
  Top Layer w5: U14.P7@1090.69,1049.81 1090.69,1066.08 v1(1091.59,1066.98) ; CN10.10@3118.11,1941.93 3118.11,1902.56 3126.88,1893.79 v1(3132.04,1893.79)
  Internal Signal 1 w5: v1(979.38,1627.05) 977.28,1627.05 957.68,1646.65 957.68,1977.36 1066.68,2086.37 2970.72,2086.37 3132.04,1925.04 v1(3132.04,1893.79)
  Internal Signal 2 w5: v1(979.38,1627.05) 979.38,1623.08 979.33,1623.03 1029.53,1572.83 1287.4,1572.83 1304.13,1556.1 1304.13,1357.28 1260.88,1314.03 1184.11,1314.03 1171.07,1300.99 1171.07,1268.25 1155.12,1252.3 v1(1155.12,1225.6)
  Bottom Layer w5: v1(1091.59,1066.98) 1091.59,1094.54 1109.25,1112.2 1109.25,1179.73 v1(1155.12,1225.6)
DSI_VDD12: C81.1 C86.1 C87.2 U14.G13 U14.K12 | length 705.9
  Top Layer w5: v1(1068.41,1321.59) 1068.41,1329.59 U14.G13@1068.41,1339.34 ; v1(1095.21,1250.25) 1103.21,1250.25 U14.K12@1112.96,1250.25
  Top Layer w12: C81.1@1334.91,1460.37 1310.06,1435.52 C87.2@1310.06,1435.02 1295.28,1420.24 1295.28,1399.61 1269.69,1374.02 1269.69,1366.14 C86.1@1285.04,1350.79 1290.55,1356.3 v1(1343.5,1356.3)
  Internal Signal 1 w5: v1(1068.41,1321.59) 1068.41,1340.07 1119.09,1390.75 1128.71,1390.75 1128.81,1390.65 1142.35,1390.65 1151.08,1399.38 1180.35,1399.38 1207.68,1372.05 1285.43,1372.05 1315.94,1402.56 1333.66,1402.56 1345.47,1390.75 1345.47,1358.27 v1(1343.5,1356.3)
  Internal Signal 2 w5: v1(1068.41,1321.59) 1068.41,1277.05 v1(1095.21,1250.25)
GND: Bat.2 Bat.3 Bat.4 BB1.2 BB1.6 BB1.9 BTN.2 BTN.3 BTN.4 C1.2 C2.2 C3.2 C4.1 C5.2 C6.1 C17.2 C18.1 C19.1 C23.2 C24.2 C42.2 C43.2 C44.2 C45.2 C46.2 C47.2 C48.2 C49.2 C50.2 C51.2 C52.2 C53.2 C54.2 C57.2 C58.2 C59.2 C60.2 C62.2 C65.2 C67.2 C68.2 C69.2 C70.2 C71.2 C72.2 C73.2 C74.2 C75.2 C76.2 C77.1 C78.1 C80.2 C81.2 C82.2 C83.2 C84.2 C85.2 C86.2 C87.1 C88.2 C89.2 C90.2 C91.2 C92.2 C93.2 C94.2 C95.2 C96.2 C97.1 C98.2 CN1.5 CN2.2 CN2.7 CN2.8 CN2.9 CN2.10 CN2.11 CN2.12 CN3.20 CN3.26 CN3.32 CN3.39 CN3.40 CN4.5 CN4.6 CN4.7 CN4.8 CN4.9 CN4.10 CN4.11 CN10.7 CN10.8 CN10.12 CN10.15 CN10.18 CN10.21 CN10.24 CN10.25 CN10.26 D5.D2 L2.1 R5.1 R19.2 R22.2 R122.1 Rdiv2.1 Rpre.1 Rset.2 STBC.A3 STBC.B2 STBC.B4 STBC.C1 T2.2 U1.2 U4.A3 U4.B3 U4.B8 U4.C1 U4.D1 U4.E9 U4.F1 U4.L3 U4.L9 U4.M1 U4.N1 U4.P3 U4.P8 U4.R3 U5.4 U14.F2 U14.F6 U14.F7 U14.F8 U14.F9 U14.F10 U14.G6 U14.G10 U14.G12 U14.H6 U14.H10 U14.J6 U14.J10 U14.K6 U14.K7 U14.K8 U14.K9 U14.K10 U14.L6 U14.M1 U14.N1 | length 8071.7
  Top Layer w4: v1(824.84,1916.43) 824.94,1916.34 STBC.A3@837.6,1916.34 STBC.B4@853.35,1932.09 ; STBC.B2@853.35,1900.59 STBC.C1@869.09,1884.84 v1(869.09,1861.22)
  Top Layer w5: CN3.40@110.04,889.76 v1(141.73,889.76) ; v1(624.02,484.25) 637.19,471.08 637.19,442.54 U4.B8@652.56,427.17 ; v1(869.09,1990.16) Rpre.1@889.09,1990.15 ; v1(910.43,177.17) 920.65,187.38 920.65,254.31 U4.L3@936.02,269.68 ; U4.P8@1030.51,427.17 1046.26,442.91 1154.53,442.91 1182.7,414.74 C45.2@1182.7,385.83 ; v1(1080.71,268.98) 1080.86,268.83 1181.84,268.83 C42.2@1182.7,269.68 ; v1(3453.74,2111.22) 3471.46,2128.94 D5.D2@3471.46,2137.8
  Top Layer w8: v1(80.71,731.3) 81.69,732.28 CN3.20@110.04,732.28 ; v1(81.69,779.53) CN3.26@110.04,779.53 ; v1(82.68,826.77) CN3.32@110.04,826.77 ; v1(239.17,889.76) CN3.39@273.82,889.76 349.78,889.76 C19.1@350.39,890.38
  Top Layer w10: CN2.2@276.57,1912.4 276.57,1956.69 295.28,1975.39 295.28,1994.71 C6.1@296.63,1996.06 ; C3.2@604.64,732.03 622.3,732.03 630.6,723.73 694.57,723.73 739.14,679.17 v1(742.16,679.17) ; U14.F7@912.52,1227.98 921.63,1227.98 v1(936.02,1213.58) ; U14.H6@934.79,1161.17 v1(957.06,1183.44) ; U14.F9@957.06,1272.52 v1(979.33,1250.25)
  Top Layer w12: v1(402.56,1963.58) 375,1936.02 CN2.7@375,1912.4 CN2.8@394.69,1912.4 CN2.9@414.37,1912.4 CN2.10@434.06,1912.4 ; v1(437.26,879.9) 449.09,891.73 498.65,891.73 C54.2@499.02,891.36 565.94,891.36 C93.2@566.93,892.35 C85.2@634.84,892.35 ; C46.2@606.3,101.99 C46.2@607.28,102.98 ; v1(782.52,757.91) 782.52,762.83 791.95,772.27 C74.2@801.18,772.27 C89.2@841.54,772.27 R122.1@841.54,810.35 841.48,810.41 C83.2@801.18,810.41 ; v1(846.46,657.48) 857.28,668.31 C80.2@899.61,668.31 950.79,668.31 967.52,685.04 C78.1@967.52,729.94 ; Bat.3@1009.84,2032.36 1056.22,2032.36 v1(1057.09,2031.5) ; C76.2@1104.31,823.8 1117.09,811.02 1165.88,811.02 C77.1@1173.49,803.41 ; Bat.2@1108.27,2190.83 1176.06,2190.83 v1(1176.18,2190.95) 1176.8,2191.56 C5.2@1235.24,2191.56 ; v1(1114.17,2031.5) 1115.04,2032.36 Bat.4@1159.45,2032.36 ; C53.2@1247.03,809.04 1247.03,806.12 1263.74,789.41 v1(1363.26,789.41) ; C65.2@1256.49,987.79 1272.64,1003.94 1289.37,1003.94 1329.71,963.6 C70.2@1330.73,963.6 1365.12,998 1365.12,999.02 C91.2@1335.61,1028.53 1321.81,1042.32 1307.05,1042.32 C71.2@1286.4,1062.97 ; v1(1267.72,1443.9) 1267.72,1446.85 1282.22,1461.35 C87.1@1282.22,1462.86 ; C67.2@1267.73,900.61 1268.68,900.61 1305.08,864.22 v1(1363.26,864.22) ; BB1.6@1292.57,2094.33 1337.44,2094.33 1349.41,2106.3 1349.41,2151.17 BB1.2@1349.57,2151.33 1349.57,2201.24 C2.2@1349.04,2201.77 ; BB1.9@1349.57,2057.33 1349.57,2038.23 1360.92,2026.87 v1(1371.8,2026.87) ; C73.2@1359.27,1153.56 1367.13,1161.42 v1(1367.13,1176.18) ; CN10.7@3059.05,1941.93 3059.05,1903.54 v1(3065.94,1896.65) 3078.74,1909.45 CN10.8@3078.74,1941.93 ; CN10.12@3157.48,1941.93 3157.48,1976.32 v1(3157.63,1976.47) ; v1(3216.54,1899.61) CN10.15@3216.53,1941.93 ; v1(3275.59,1896.65) CN10.18@3275.59,1941.93 ; v1(3334.65,1897.64) CN10.21@3334.64,1941.93 3334.64,2048.23 C82.2@3337.6,2051.18 C82.2@3337.97,2051.55 ; CN10.24@3393.7,1941.93 3393.7,1891.73 v1(3394.69,1890.75)
  Top Layer w13.78: U14.F2@801.16,1116.63 801.16,1126.37 ; v1(912.52,916.18) U14.N1@934.79,938.46 ; U14.G6@912.52,1183.44 922.26,1183.44 ; U14.F8@934.79,1250.25 v1(957.06,1227.98) ; v1(979.33,1161.17) U14.K7@1001.6,1138.89 ; v1(979.33,1277.05) U14.F10@979.33,1294.79 ; U14.L6@1001.6,1094.35 1001.6,1104.1 ; v1(1001.6,1183.44) U14.K8@1023.87,1161.17 ; v1(1023.87,1205.71) U14.K9@1046.14,1183.44 ; 1036.4,1227.98 U14.J10@1046.14,1227.98 ; 1046.14,1307.32 U14.G12@1046.14,1317.06
  Top Layer w15: v1(30.51,1031.5) C17.2@30.51,1056.47 ; R22.2@215.56,1106.61 230.99,1106.61 v1(241.14,1096.46) ; U1.2@312.99,1091.54 311.02,1093.5 313.99,1096.47 v1(313.99,1124.07) 322.46,1132.54 C18.1@322.46,1144.69 ; v1(422.24,333.66) 423.23,332.68 477.36,332.68 ; U5.4@489.17,2012.6 537.2,2012.6 v1(537.4,2012.8) ; C50.2@496.68,283.46 496.68,313.36 477.36,332.68 ; C43.2@496.68,374.02 496.68,351.99 477.36,332.68 ; C57.2@536.42,101.99 C46.2@606.3,101.99 ; C95.2@543.29,1453.72 583.66,1413.35 583.66,1406.5 570.28,1393.11 C98.2@566.34,1393.11 537.4,1364.17 535.43,1364.17 535.43,1338.39 v1(554.92,1318.9) C60.2@587.01,1286.81 ; C96.2@544.29,1134.23 C68.2@583.66,1134.23 606.91,1134.23 616.51,1124.63 C94.2@616.51,1101.38 616.51,1087.97 596.7,1068.16 v1(596.7,1063.6) ; v1(561.02,1586.61) C75.2@561.02,1608.64 ; C44.2@594.49,561.39 594.49,513.78 v1(624.02,484.25) ; C46.2@607.28,102.98 v1(607.28,126.97) ; v1(607.28,256.89) 608.27,256.89 U4.A3@621.06,269.68 U4.B3@652.56,269.68 ; v1(608.3,1552.24) 623.12,1537.42 C88.2@626.99,1537.42 ; C59.2@680.12,101.99 680.12,128.94 v1(678.15,130.91) 678.15,200.79 U4.C1@684.06,206.69 U4.D1@715.55,206.69 ; C51.2@685.04,561.39 685.04,543.31 717.52,510.83 ; v1(692.47,487.21) 717.52,487.21 ; U4.E9@747.05,458.66 743.84,458.66 743.84,466.95 742.87,467.91 742.87,479.04 734.7,487.21 717.52,487.21 ; C52.2@776.57,561.39 761.2,561.39 717.52,517.72 717.52,510.83 ; U4.F1@778.54,206.69 756.89,185.04 C58.2@756.89,101.99 779.16,101.99 v1(780.51,103.35) ; Rset.2@781.49,1891.42 781.49,1879.93 v1(793.31,1868.11) ; v1(800.24,1716.62) 824.81,1692.05 R5.1@824.81,1648.31 ; v1@801.16,1126.37 v1(801.16,1134.37) ; v1(853.35,2123.03) 853.72,2123.4 C62.2@879.92,2123.4 ; U14.F6@890.25,1205.71 928.15,1205.71 v1(936.02,1213.58) ; C49.2@910.43,101.99 v1(910.43,177.17) ; U14.M1@912.52,960.73 U14.N1@934.79,938.46 ; v1@922.26,1183.44 v1(930.26,1183.44) ; U4.L9@936.02,458.66 965.58,488.21 v1(978.39,488.21) 979.33,489.15 979.33,502.95 1009.84,533.46 C47.2@1009.84,561.39 ; C90.2@942.91,1687.62 974.78,1687.62 v1(985.24,1677.17) ; U14.J6@957.06,1138.9 v1(979.33,1161.17) ; U14.K6@979.33,1116.62 983.86,1112.1 v1(1001.6,1112.1) v1@1001.6,1104.1 ; U4.N1@999.02,206.69 U4.M1@967.52,206.69 967.52,178.21 v1(967.57,178.16) 1006.89,138.84 C48.2@1006.89,101.99 ; U14.G10@1001.6,1272.52 v1(979.33,1250.25) 1001.6,1227.98 1024.61,1227.98 ; U14.H10@1023.87,1250.25 1023.87,1228.71 1024.61,1227.98 ; U4.P3@1030.51,269.68 U4.R3@1062.01,269.68 1080,269.68 v1(1080.71,268.98) ; U4.P8@1030.51,427.17 1030.83,427.17 1041.63,416.36 v1(1042.37,416.36) ; 1036.4,1227.98 1024.61,1227.98 ; U14.J10@1046.14,1227.98 U14.K10@1068.42,1205.71 ; v1(1046.14,1299.32) v1@1046.14,1307.32 ; v1(1063.04,941.98) 1062.59,941.98 1040.35,919.74 1040.35,887.76 C92.2@1066.91,861.2 C76.2@1104.31,823.8 ; v1(1071.85,1962.6) 1073.81,1960.63 Rdiv2.1@1073.81,1932.76 ; v1(1081.69,32.48) R19.2@1081.69,55.79 ; C69.2@1124.02,1611.83 C72.2@1174.21,1611.83 C84.2@1226.38,1611.83 1246.66,1611.83 v1(1247.11,1612.28) ; C86.2@1207.09,1428.74 1223.43,1412.4 1233.27,1412.4 1264.76,1443.9 v1(1267.72,1443.9) ; v1(1235.24,1988.87) C1.2@1235.24,2018.09 ; C87.1@1282.22,1462.86 1307.07,1487.71 C81.2@1307.07,1488.21 ; C2.2@1349.04,2201.77 1366.14,2201.77 v1(1367.13,2200.79) ; C4.1@1352.34,283.1 1352.34,265.77 v1(1365.16,252.95) ; T2.2@2453.74,1842.36 2497.87,1842.36 v1(2498.03,1842.52) ; CN4.5@3631.5,1904.53 3631.5,1935.73 CN4.6@3645.67,1949.9 ; 717.52,487.21 717.52,510.83
  Top Layer w20: CN2.11@182.09,1784.45 v1(250.98,1784.45) ; C6.1@296.63,1996.06 370.08,1996.06 v1(402.56,1963.58) ; v1(439.96,1784.45) CN2.12@508.86,1784.45 ; BTN.3@1185.04,40.87 v1(1185.04,97.44) ; BTN.2@1310.04,85.16 1339.09,85.16 v1(1353.35,99.41) 1368.11,84.65 BTN.4@1368.11,40.87 ; v1(1668.31,2175.2) CN1.5@1722.05,2175.2 ; v1(2295.28,2063.98) 2297.24,2065.95 L2.1@2334.65,2065.95 ; v1(2866.14,1753.94) CN10.25@2866.14,1813.98 ; C82.2@3337.97,2051.55 C97.1@3337.97,2110.24 ; CN10.26@3468.5,1813.98 3468.5,1769.69 3481.3,1756.89 3562.01,1756.89 v1(3564.96,1753.94) 3642.82,1753.94 CN4.7@3645.67,1756.79 ; C23.2@3589.57,2096.83 3634.47,2096.83 C24.2@3660.43,2070.87 3660.43,2021.65 v1(3645.67,2006.89) CN4.6@3645.67,1949.9 ; CN4.8@3736.22,1820.37 CN4.10@3736.22,1738.68 3787.89,1738.68 v1(3788.39,1739.17) ; CN4.9@3736.22,1886.32 CN4.11@3736.22,1968.01 3739.67,1971.46 v1(3791.34,1971.46)
  Bottom Layer w15: v1(607.28,126.97) v1(607.28,256.89)
  other v1: 1369.09,999.02